# Altium PCB PCB2.PcbDoc
Units mil, origin at the board's own origin, x right, y up, seen from the top; angles counter-clockwise.
Board outline 5875 x 2810 mil, 2 copper layers (Top Layer, Bottom Layer); 41 components, 27 nets, 103 pads, 30 vias.
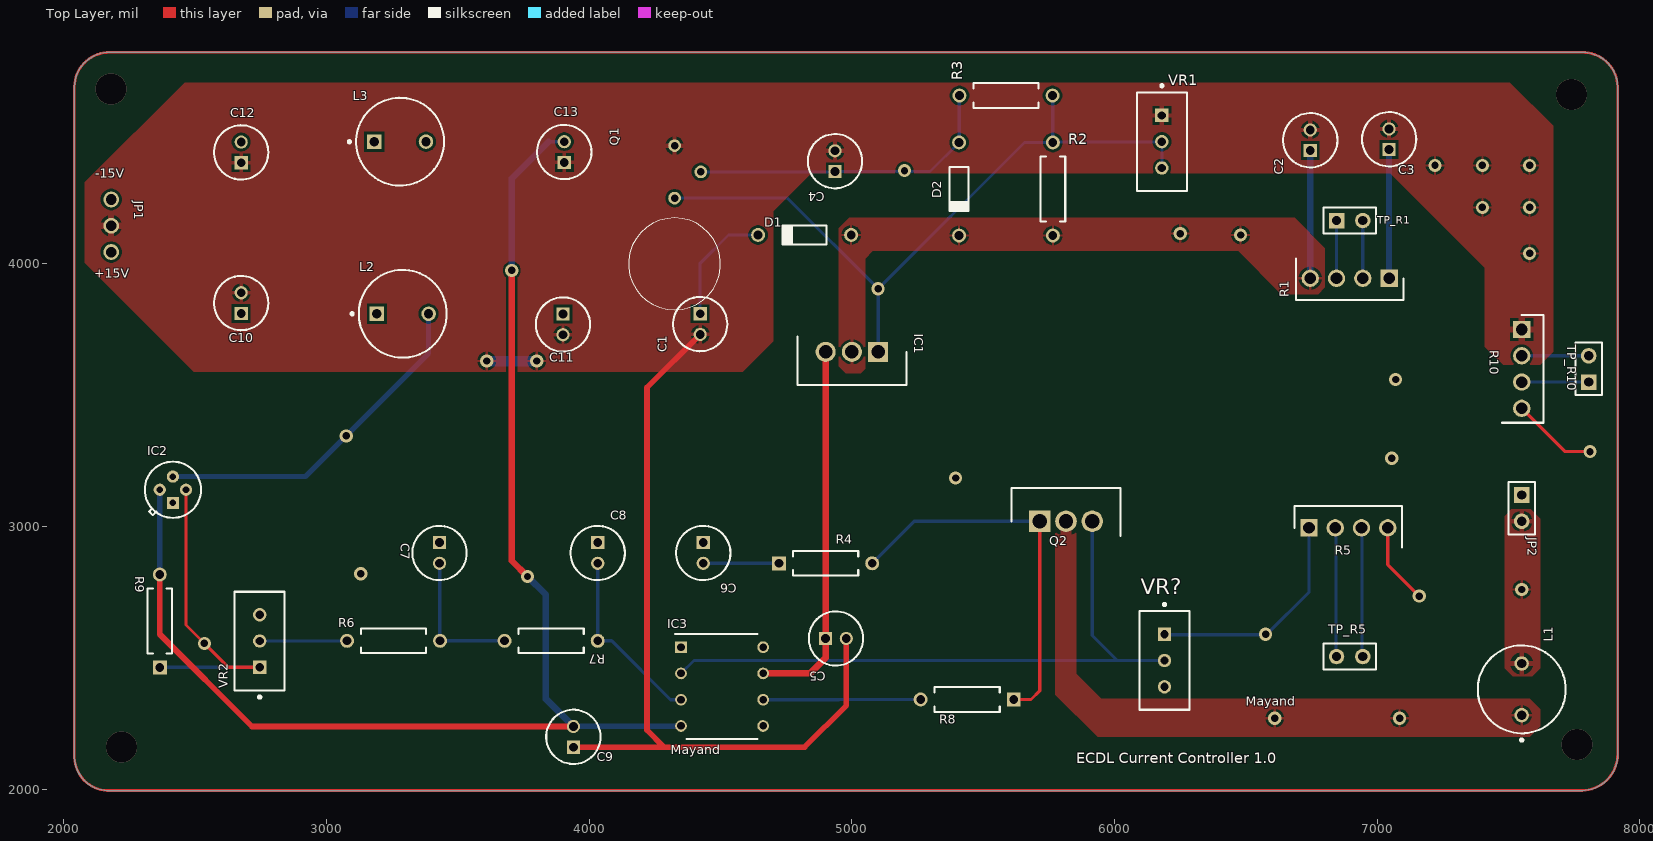
[diagram p0: Top Layer view]
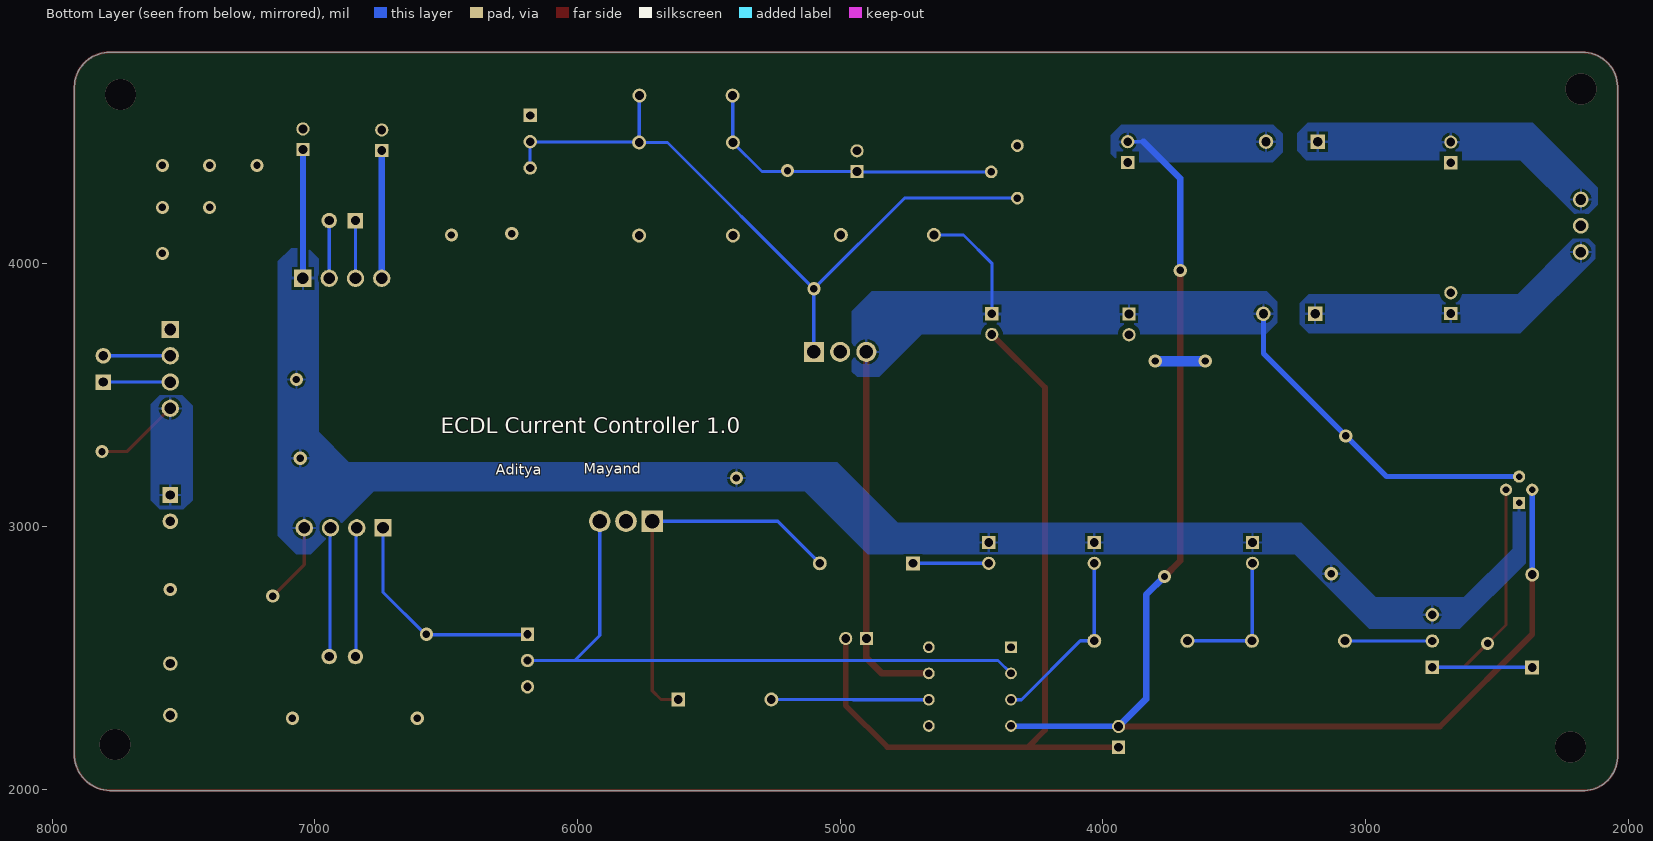
[diagram p1: Bottom Layer view, seen from below]
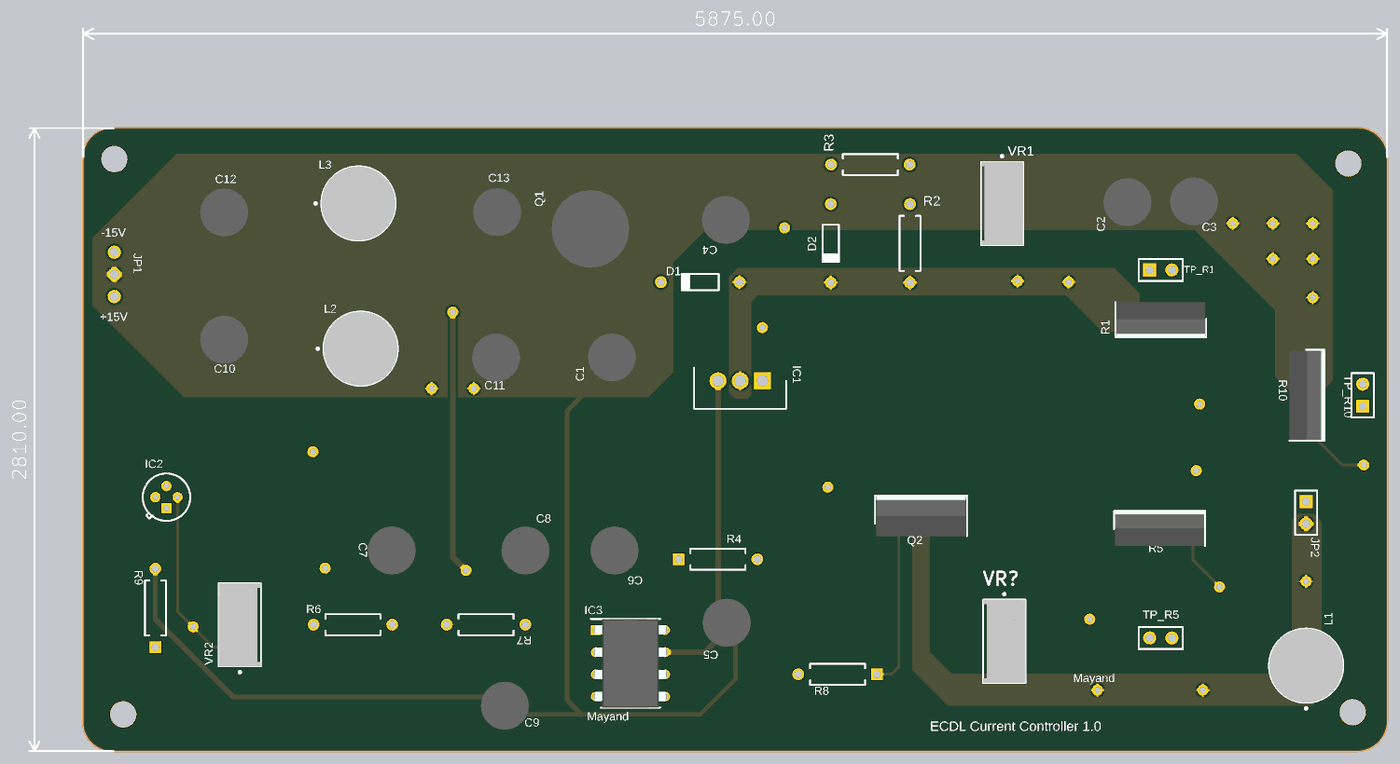
[diagram p2: 3D render of the assembled board from above, using the file's embedded part models]

## Layer stack, top to bottom
Top Solder: solder mask 0.4, Solder Resist, Dk 3.5
Top Layer: signal copper 1.4
Dielectric 1: dielectric 12.6, FR-4, Dk 4.8
Bottom Layer: signal copper 1.4
Bottom Solder: solder mask 0.4, Solder Resist, Dk 3.5

## Board outline
2040,2120 2040,4675 cw(c2172.5,4672.5) 2175,4805 7780,4805 cw(c7782.5,4672.5) 7915,4675 7915,2135 cw(c7777.5,2132.5) 7780,1995 2175,1995 cw(c2170,2125)

## Design rules (kind name [scope] priority, off if disabled: settings)
Clearance Clearance_1 [All] p1: gap=10 ignorepadtopadclearanceinfootprint=FALSE
Clearance [All] p2: gap=18 ignorepadtopadclearanceinfootprint=TRUE except(0: Arc-Hole Track-Hole SMDPad-Hole THPad-Hole Via-Hole Fill-Hole Poly-Hole Region-Hole Text-Hole; 10: Text-Text; 15: Arc-THPad Track-THPad)
PolygonConnect [All] p1: connectstyle=Relief reliefconductorwidth=10 reliefentries=4 polygonreliefangle="90 Angle" airgapwidth=10
RoutingVias [All] p1: holewidth=28 width=50 viastyle="Through Hole" minholewidth=28 minwidth=50 maxholewidth=28 maxwidth=50
SolderMaskExpansion [All] p1: expansion=4 istentingtop=FALSE
Width [All] p1: maxlimit=40 minlimit=8 preferedwidth=12
30 further rules are at their usual default settings.

## Components (designator, comment, footprint, x,y, rotation, side; value= is the part's Value field where it differs from the comment)
C1 "RFS-16V100ME3#5" CAPPRD200W65D525H1250 4422.3,3809.93 r270 top value=0.1uF
C2 "RFS-16V100ME3#5" CAPPRD200W65D525H1250 6745,4431.26 r90 top value=1uF
C3 "RFS-16V100ME3#5" CAPPRD200W65D525H1250 7045,4435 r90 top value=22uF
C4 "RFS-16V100ME3#5" CAPPRD200W65D525H1250 4935.55,4351.45 r90 top value=1uF
C5 "RFS-16V100ME3#5" CAPPRD200W65D525H1250 4900,2573.82 r0 top value=0.1uF
C6 "RFS-16V100ME3#5" CAPPRD200W65D525H1250 4434.08,2938.74 r270 top value=8.2nF
C7 "RFS-16V100ME3#5" CAPPRD200W65D525H1250 3430,2938.74 r270 top value=22uF
C8 "RFS-16V100ME3#5" CAPPRD200W65D525H1250 4032.32,2938.74 r270 top value=22uF
C9 "RFS-16V100ME3#5" CAPPRD200W65D525H1250 3939.65,2160.02 r90 top value=0.1uF
C10 "RFS-16V100ME3#5" CAPPRD200W65D525H1250 2675,3811.26 r90 top value=0.1uF
C11 "RFS-16V100ME3#5" CAPPRD200W65D525H1250 3900,3808.74 r270 top value=0.1uF
C12 "RFS-16V100ME3#5" CAPPRD200W65D525H1250 2675,4385 r90 top value=0.1uF
C13 "RFS-16V100ME3#5" CAPPRD200W65D525H1250 3905,4386.26 r90 top value=0.1uF
D1 "1N4148" NXP-SOD27-2_V 4820,4110 r180 top
D2 "1N4148" NXP-SOD27-2_V 5408.11,4285 r270 top
IC1 "LM317AT_NOPB" TO254P470X1028X1955-3P 5100,3665 r180 top
IC2 "LM399H" LM399H 2415,3090 r90 top
IC3 "Mayand" DIP794W53P254L1016H394Q8N 4505.69,2390.75 r0 top
JP1 "PIN HEADER" 1X03 2180,4145 r270 top
JP2 "Header 2" HDR1X2#1 7550,3120 r270 top
L1 "RL622-101K-RC" INDR62-500-1100X850X1100#1 7550,2380 r90 top value=100µH
L2 "RL622-101K-RC" INDR62-500-1100X850X1100#2 3290,3810 r0 top value=100µH
L3 "RL622-101K-RC" INDR62-500-1100X850X1100#2 3280,4465 r0 top value=100µH
Q1 "2N2905" 2N2905 4325,4250.2 r90 top
Q2 "IRF9Z14PBF" TO254P465X1024X2050-3P 5715,3020 r0 top
R1 "Y09261R00000F9L" TO254P401X1016X2196-4P 7045,3945 r180 top
R2 "MFR-25FBF52-475K" RESA60-630X240#1 5765,4285 r270 top value=240
R3 "MFR-25FBF52-475K" RESA60-630X240#1 5586.62,4640.58 r0 top value=50k
R4 "MFR-25FBF52-475K" RESA60-630X240#2 4900,2860 r0 top value=100
R5 "Y09261R00000F9L" TO254P401X1016X2196-4P 6740,2995 r0 top
R6 "MFR-25FBF52-475K" RESA60-630X240#1 3255,2565 r180 top value=3k
R7 "MFR-25FBF52-475K" RESA60-630X240#1 3855,2565 r180 top value=3k
R8 "MFR-25FBF52-475K" RESA60-630X240#2 5438.89,2341.59 r180 top value=10k
R9 "MFR-25FBF52-475K" RESA60-630X240#2 2365,2640 r90 top value=7.5k
R10 "Y09261R00000F9L" TO254P401X1016X2196-4P 7550,3750 r270 top
TP_R1 "Header 2" HDR1X2#1 6845,4165 r0 top
TP_R5 "Header 2" HDR1X2#2 6945,2505 r180 top
TP_R10 "Header 2" HDR1X2#1 7805,3550 r90 top
VR1 "3296W-1-103LF" BOUR-3296W 6180,4465 r270 top
VR2 "3296W-1-103LF" BOUR-3296W 2745.51,2564.12 r90 top
VR? "3296W-1-103LF" BOUR-3296W 6190,2490 r270 top

## Footprints (in the part's own frame and the unit in brackets; to place one, negate y for a bottom-side part, rotate by r counter-clockwise, add the part's x,y. Pads: shape width x height; smd on the part's side, far side on the other; paste and mask are expansions set on the pad)
1X03 [mil]
  round 60 hole 40: 1(-100,0) 2(0,0) 3(100,0)
2N2905 [mm]
  round 1.23 hole 0.73: 1(0,0) 2(2.538,-2.535) 3(5.075,0)
  silkscreen extent -10.81,-4.43 -1.91,4.43, body extent -1.91,-4.45 6.99,4.45, height 6.7
BOUR-3296W [mm] "THD, 3-Leads, Body 9.53x4.83mm, Pitch 2.54mm"
  rect 1.3x1.3 hole 0.8: 1(-2.54,0)
  round 1.3 hole 0.8: 2(0,0) 3(2.54,0)
  silkscreen extent -5.54,-2.41 4.76,2.42, body extent -4.76,-2.4 4.76,2.42, height 11.55
CAPPRD200W65D525H1250 [mm]
  rect 1.275x1.275 hole 0.85: 1(0,0)
  round 1.275 hole 0.85: 2(2,0)
  silkscreen extent -1.62,-2.62 3.62,2.63, body extent -1.75,-2.75 3.75,2.75, height 12.5
DIP794W53P254L1016H394Q8N [mil]
  rect 44.61x44.61 hole 28.86: 1(-156.26,150)
  round 44.61 hole 28.86: 2(-156.26,50) 3(-156.26,-50) 4(-156.26,-150) 5(156.26,-150) 6(156.26,-50) 7(156.26,50) 8(156.26,150)
  silkscreen extent -179,-200 135,200, body extent -161,-200 161,200, height 155
HDR1X2#1 [mm] "Connector; Header; 2 Position"
  rect 1.5x1.5 hole 0.9: 1(0,0)
  round 1.5 hole 0.9: 2(2.54,0)
  silkscreen extent -1.27,-1.27 3.81,1.27
HDR1X2#2 [mm] "Connector; Header; 2 Position"
  round 1.5 hole 0.9: 1(0,0) 2(2.54,0)
  silkscreen extent -1.27,-1.27 3.81,1.27
INDR62-500-1100X850X1100#1 [mm] "THD, 2-Leads, Dia 8.5mm, Pitch 5mm"
  round 1.4 hole 0.9: 1(-2.5,0) 2(2.5,0)
  silkscreen extent -5.02,-4.25 4.25,4.25, body extent -4.25,-4.25 4.25,4.25, height 11
INDR62-500-1100X850X1100#2 [mm] "THD, 2-Leads, Dia 8.5mm, Pitch 5mm"
  rect 1.4x1.4 hole 0.9: 1(-2.5,0)
  round 1.4 hole 0.9: 2(2.5,0)
  silkscreen extent -5.02,-4.25 4.25,4.25, body extent -4.25,-4.25 4.25,4.25, height 11
LM399H [mil]
  rect 46.54x46.54 hole 25.37: 1(0,0)
  round 46.54 hole 25.37: 2(50,-50) 3(100,0) 4(50,50)
  silkscreen extent -57,-107 157,107
NXP-SOD27-2_V [mm] "SOD27, 2-Leads, Dia 1.85mm, Body Length 4.25mm, Pin Spacing 9mm"
  round 1.35 hole 0.85: 1(-4.5,0) 2(4.5,0)
  silkscreen extent -2.12,-0.93 2.13,0.92, body extent -4.78,-0.93 4.78,0.92, height 1.85
RESA60-630X240#1 [mm] "Axial Resistor, 2-Leads, Dia 2.4mm, Body Length 6.3mm"
  round 1.35 hole 0.85: 1(-4.5,0) 2(4.5,0)
  silkscreen extent -3.15,-1.2 3.15,1.2, body extent -4.77,-1.19 4.77,1.2, height 2.4
RESA60-630X240#2 [mm] "Axial Resistor, 2-Leads, Dia 2.4mm, Body Length 6.3mm"
  rect 1.35x1.35 hole 0.85: 1(-4.5,0)
  round 1.35 hole 0.85: 2(4.5,0)
  silkscreen extent -3.15,-1.2 3.15,1.2, body extent -4.77,-1.19 4.77,1.2, height 2.4
TO254P401X1016X2196-4P [mm]
  rect 1.68x1.68 hole 1.12: 1(0,0)
  round 1.68 hole 1.12: 2(2.54,0) 3(5.08,0) 4(7.62,0)
  silkscreen extent -1.4,-1.9 9.02,2.11, body extent -1.27,-1.9 8.89,2.11, height 20.7
TO254P465X1024X2050-3P [mm]
  rect 2.085x2.085 hole 1.39: 1(0,0)
  round 2.085 hole 1.39: 2(2.54,0) 3(5.08,0)
  silkscreen extent -2.72,-1.43 7.8,3.22, body extent -2.58,-1.43 7.66,3.22, height 18.77
TO254P470X1028X1955-3P [mm]
  rect 1.935x1.935 hole 1.29: 1(0,0)
  round 1.935 hole 1.29: 2(2.54,0) 3(5.08,0)
  silkscreen extent -2.73,-1.5 7.81,3.2, body extent -3,-1.77 8.09,3.48

## Part data
C1 C2 C3 C4 C5 C6 C7 C8 C9 C10 C11 C12 C13: "Capacitor Polarised", Manufacturer_Name=Elna, Mouser Part Number=555-RFS16V100ME3#5, Datasheet Link=http://www.elna.co.jp/en/capacitor/alumi/catalog/pdf/rfs_e.pdf, Height=12.5mm, Manufacturer_Part_Number=RFS-16V100ME3#5, Mouser Price/Stock=https://www.mouser.co.uk/ProductDetail/Elna/RFS-16V100ME35?qs=HV%2FSjD3ivR%2FtACP0T6MAAg%3D%3D
D1 D2: library part CMP-004-00000-2, "High Speed Diode, 100 V, 0.45 A, -65 to 175 degC, 2-Pin SOD27, RoHS, Bulk", Case/Package=DO, Forward Current=300mA, Forward Voltage=1V, Manufacturer=Fairchild, Max Operating Temperature=175°C, Max Surge Current=4A, Min Operating Temperature=-65°C, Package Quantity=2000, Package Reference=SOD27, Peak Reverse Current=5uA, Power=500mW, Datasheet URL=http://www.nxp.com/documents/data_sheet/1N4148_1N4448.pdf, Datasheet Version=Aug-04, Diameter=1.91mm, Elements=1, Manufacturer URL=https://www.fairchildsemi.com/, Package URL=http://www.nxp.com/documents/data_sheet/1N4148_1N4448.pdf, Packaging=Bulk, Pins=2, Recovery Time=4ns, RoHS Compliant=True
IC1: "Integrated Circuit", Arrow Part Number=LM317AT/NOPB, Manufacturer_Name="Texas Instruments", Mouser Part Number=926-LM317AT/NOPB, Arrow Price/Stock=https://www.arrow.com/en/products/lm317atnopb/texas-instruments?region=nac, Datasheet Link=http://www.ti.com/lit/gpn/lm317a, Height=4.7mm, Manufacturer_Part_Number=LM317AT/NOPB, Mouser Price/Stock=https://www.mouser.co.uk/ProductDetail/Texas-Instruments/LM317AT-NOPB?qs=X1J7HmVL2ZFYFJRcNgsWcQ%3D%3D
IC2: "Integrated Circuit", Manufacturer_Name="Analog Devices", Arrow Part Number=LM399H, Arrow Price/Stock=https://www.arrow.com/en/products/lm399h/analog-devices, Datasheet Link=https://www.analog.com/media/en/technical-documentation/data-sheets/199399fc.pdf, Height=2.667mm, Manufacturer_Part_Number=LM399H
IC3: library part LT1028ACN8#PBF, "Integrated Circuit", Manufacturer_Name="Linear Technology", Datasheet Link=http://cds.linear.com/docs/en/datasheet/1028fd.pdf, Height=3.937mm, Manufacturer_Part_Number=LT1028ACN8#PBF
JP1: library part PINHD-1X3, Package=1X03, DeviceSetName=PINHD-1X3, GateName_1=A, LibraryName=adafruit, SymbolName_1=PINHD3
JP2 TP_R1 TP_R5 TP_R10: "Header, 2-Pin", LatestRevisionDate=17-Jul-2002, LatestRevisionNote="Re-released for DXP Platform.", Publisher="Altium Limited"
L1 L2 L3: library part CMP-006-00013-6, "Radial Inductor, 100 uH, +/- 10%, 0.91 A, -55 to 105 degC, 2-Pin THD, RoHS, Bulk", Case/Package=Radial, Current Rating=910mA, Inductance Tolerance=10%, Manufacturer=Bourns, Max Operating Temperature=105°C, Min Operating Temperature=-55°C, Package Description="2-Pin Radial Lead, Dia 8.5 mm, Pitch 5 mm", Package Quantity=100, Package Reference=INDR62-500-1100X850X1100, Resistance=0.28Ohm, Self Resonant Frequency=3.7MHz, Core Material=Ferrite, Datasheet URL=http://www.bourns.com/docs/Product-Datasheets/rl622_series.pdf, Datasheet Version=Aug-10, Diameter=8.5mm, Lead Pitch=5mm, Mounting Technology=TH, Packaging=Bulk, Pins=2, Q Factor=20, RoHS Compliant=True, Shielding=Unshielded, Tolerance=10%
Q1: "Transistor BJT PNP", Manufacturer_Name=MULTICOMP, Datasheet Link=https://componentsearchengine.com/Datasheets/2/2N2905.pdf, Height=6.6mm, Manufacturer_Part_Number=2N2905
Q2: "MOSFET (P-Channel)", Manufacturer_Name=Vishay, Mouser Part Number=844-IRF9Z14PBF, Arrow Part Number=IRF9Z14PBF, Arrow Price/Stock=https://www.arrow.com/en/products/irf9z14pbf/vishay, Datasheet Link=https://www.vishay.com/docs/91088/91088.pdf, Height=4.65mm, Manufacturer_Part_Number=IRF9Z14PBF, Mouser Price/Stock=https://www.mouser.co.uk/ProductDetail/Vishay-Semiconductors/IRF9Z14PBF/?qs=cvaI6ThkwxtNPJLFfJQjXw%3D%3D
R1 R5 R10: "Resistor", Manufacturer_Name=Vishay, Mouser Part Number=71-VPR221T1R0000FB, Datasheet Link=https://www.mouser.com/datasheet/2/428/vpr22021-470867.pdf, Height=4.01mm, Manufacturer_Part_Number=Y09261R00000F9L, Mouser Price/Stock=https://www.mouser.co.uk/ProductDetail/Vishay-Precision-Group-Foil-Resistors/Y09261R00000F9L?qs=NHnMxE5Fd3z%252BuQNCyVCBVA%3D%3D
R2 R3 R4 R6 R7 R8 R9: library part CMP-009-00055-4, "Axial Resistor, 475 KOhm, +/- 1%, 0.25 W, -55 to 155 degC, 2-Pin THD, RoHS, Bulk", Case/Package=Axial, Manufacturer=Yageo, Max Operating Temperature=155°C, Min Operating Temperature=-55°C, Package Description="2-Pin Axial Lead, Dia 2.4 mm, Body Length 6.3 mm", Package Quantity=200, Package Reference=MFR-25, Power=250mW, Tolerance=1%, Voltage Rating=250V, Datasheet URL=http://www.yageo.com/documents/recent/Yageo%20LR_MFR_2013.pdf, Datasheet Version=Apr-13, Manufacturer URL=http://www.yageo.com/, Mounting Technology=TH, Packaging=Bulk, RoHS Compliant=True
VR1 VR2 VR?: library part CMP-009-00038-2, "Square Trimpot(R) Trimming Potentiometer, 10 KOhm, +/- 10%, 0.5 W, -55 to 125 degC, 3-Pin THD, RoHS, Tube", Case/Package=3296W, Manufacturer=Bourns, Max Operating Temperature=150°C, Min Operating Temperature=-55°C, Package Description="3-Pin Through Hole Device, Body 9.53 x 4.83 mm, Pitch 2.54 mm", Package Quantity=50, Power=500mW, Resistance=10k, Tolerance=10%, Voltage Rating=300V, Datasheet URL=http://www.bourns.com/docs/Product-Datasheets/3296.pdf, Datasheet Version=May-16, Manufacturer URL=http://www.bourns.com/, Mounting Technology=TH, Package Reference=3296W, Packaging=Rail/Tube, RoHS Compliant=True

## Via types
v1: diameter 50, hole 28, Top Layer to Bottom Layer, 26 vias
v2: diameter 118.11, hole 118.11, Top Layer to Bottom Layer, 4 vias

## Nets (pads, with @x,y where several pads share a name; then routed paths per layer and width w, separated by ;. In a path a pad name is that pad's centre, name@x,y a point inside that pad or via, vN(x,y) a via of type N, cw(c..) or ccw(c..) an arc to the next point about the centre after c; other vN are vias at no path point)
+15V: C1.1 C5.1 C11.1 D1.2 IC1.3 IC2.3 IC3.7 L2.2 | length 3204.1
  Top Layer w25: IC3.7 4840.75,2440.75 4900,2500 C5.1 IC1.3
  Bottom Layer w12: C1.1 4422.3,4002.3 4530,4110 D1.2
  Bottom Layer w20: IC2.3 2920,3190 3388.43,3658.43 L2.2
  other v1: 3075,3345
+15V_I: C10.1 JP1.3 L2.1
-15V: C9.2 C13.2 IC2.4 IC3.4 L3.2 R9.2 | length 5122.2
  Top Layer w22: R9.2 2365,2590 2716.24,2238.76 C9.2
  Top Layer w25: v1(3705,3975) 3705,2870 v1(3765,2810)
  Bottom Layer w12: 3845,4465 C13.2 ; C9.2 3940,2239.11 C9.2@3940.64,2239.75 ; IC3.4@4348.44,2239.75 IC3.4
  Bottom Layer w20: R9.2 IC2.4
  Bottom Layer w22: C9.2@3940.64,2239.75 IC3.4@4348.44,2239.75
  Bottom Layer w25: v1(3705,3975) 3705,4325 3845,4465 ; v1(3765,2810) 3835,2740 3835,2343.41 C9.2
-15V_I: C12.2 JP1.1 L3.1
GND: C1.2 C2.2 C3.2 C4.2 C5.2 C9.1 C10.2 C11.2 C12.1 C13.1 JP1.2 Q1.3 R10.1 VR1.1 | length 3231.8
  Top Layer w20: C9.1 4285,2160.02 4820.02,2160.02 4978.74,2318.74 C5.2
  Top Layer w22: 4285,2160.02 4220,2225.02 4220,3528.89 C1.2
  Bottom Layer w40: v1(3610,3630) v1(3800,3630)
  other v1: 7580,4040 7400,4215 7580,4215 7220,4375 7400,4375 7580,4375
Iout: JP2.2 L1.2
  other v1: 7550,2760
NetC2_1: C2.1 D1.1 D2.2 IC1.2 R1.4 R2.2 | length 491.8
  Bottom Layer w12: D1.1 4998.25,4108.92 D1.1@4998.58,4108.58 ; IC1.2@4998.58,3666.42 IC1.2 ; D2.2@5407.03,4108.92 D2.2
  Bottom Layer w25: R1.4 C2.1
  other v1: 6480,4110 6250,4115
NetC4_1: C4.1 D2.1 Q1.2 R3.1 | length 1216.1
  Top Layer w12: C4.1@4934.22,4350.12 C4.1 ; D2.1@5405.57,4474.23 5408.11,4471.69 D2.1@5408.78,4472.36 ; R3.1@5408.78,4639.9 R3.1
  Bottom Layer w12: Q1.2 4934.22,4350.12 C4.1 5297.39,4351.45 D2.1 5408.78,4462.84 5408.78,4639.9 R3.1
  other v1: 5200,4355
NetC6_2: C6.2 R4.1 | length 288.8
  Bottom Layer w12: C6.2 R4.1
NetC7_2: C7.2 R6.1 R7.2 | length 541.6
  Bottom Layer w12: C7.2 3431.08,2858.92 3431.08,2566.08 R6.1 R7.2
NetC8_2: C8.2 IC3.3 R7.1 | length 705.2
  Bottom Layer w12: C8.2 4032.24,2859.92 4032.24,2565.08 R7.1 4085,2565 4309.25,2340.75 IC3.3
NetIC1_1: IC1.1 Q1.1 R2.1 R3.2 VR1.2 VR1.3 | length 2786.6
  Top Layer w12: R3.2 R3.2@5764.39,4639.97 ; R2.1@5764.39,4477.77 R2.1@5766.08,4476.08 ; R2.1 R2.1@5766.08,4463.25 ; R2.1@5767.83,4465 R2.1@5766.08,4463.25 ; R2.1@5778.58,4463.58 R2.1@5766.08,4476.08 ; R2.1@5766.08,4463.25 R2.1@5766.08,4476.08
  Bottom Layer w12: Q1.1 4754.8,4250.2 v1(5100,3905) ; IC1.1 v1(5100,3905) ; R3.2 5764.39,4639.97 5764.39,4462.77 R2.1 ; VR1.3 VR1.2 6178.58,4463.58 5766.42,4463.58 R2.1 ; v1(5100,3905) 5657.17,4462.17 R2.1
NetIC2_2: IC2.2 R9.1 VR2.1 | length 1243.2
  Top Layer w12: IC2.2 2465,2625 2625.88,2464.12 VR2.1
  Bottom Layer w12: R9.1 2366.28,2464.12 VR2.1
  other v1: 2535,2555
NetIC3_2: IC3.2 Q2.3 VR?.2 | length 2433.3
  Top Layer w12: VR?.2@6187.92,2492.08 VR?.2
  Bottom Layer w12: IC3.2 4398.68,2490 6010,2490 ; Q2.3 5915,2585 6010,2490 ; VR?.2 6010,2490
NetIC3_6: IC3.6 R8.2 | length 600.1
  Bottom Layer w12: IC3.6@4661.98,2340.78 4950.53,2340.78 4950.77,2341.02 5261.15,2341.02 R8.2
NetJP2_1: JP2.1 R10.4 | length 328.3
  Top Layer w12: R10.4 7715,3285 v1(7810,3285)
NetL1_1: L1.1 Q2.2
  other v1: 6610,2270 7085,2270
NetQ2_1: Q2.1 R4.2 R8.1 | length 1463.4
  Top Layer w12: R8.1 5681.59,2341.59 5715,2375 Q2.1
  Bottom Layer w12: R4.2 5237.17,3020 Q2.1 ; R8.1@5615,2342.65 R8.1
NetR1_2: R1.2 TP_R1.2 | length 220
  Bottom Layer w12: R1.2 TP_R1.2
NetR1_3: R1.3 TP_R1.1 | length 220
  Bottom Layer w12: R1.3 TP_R1.1
NetR5_1: R5.1 VR?.1 | length 863
  Bottom Layer w12: VR?.1 6192.08,2587.92 6577.92,2587.92 6740,2750 R5.1
  other v1: 6575,2590
NetR5_2: R5.2 TP_R5.2 | length 492.1
  Bottom Layer w12: R5.2 6842.5,2992.5 6842.5,2507.5 TP_R5.2
NetR5_3: R5.3 TP_R5.1 | length 492.1
  Bottom Layer w12: R5.3 6942.5,2992.5 6942.5,2507.5 TP_R5.1
NetR6_2: R6.2 VR2.2 | length 332.7
  Bottom Layer w12: VR2.2 2745.96,2564.56 3077.39,2564.56 R6.2
NetR10_2: R10.2 TP_R10.2 | length 255
  Bottom Layer w12: R10.2 TP_R10.2
NetR10_3: R10.3 TP_R10.1 | length 255
  Bottom Layer w12: R10.3 TP_R10.1
Vreg: C3.1 C6.1 C7.1 C8.1 IC2.1 R1.1 R5.4 VR2.3 | length 799.7
  Top Layer w12: R5.4 7040,2855 v1(7160,2735)
  Bottom Layer w22: R1.1 C3.1
  other v1: 3130,2820 5395,3185 7055,3260 7070,3560
pads on no net: IC3.1 IC3.5 IC3.8 VR?.3
copper on no net: | length 17141.7
  Top Layer w10: 2040,2120 ccw(c2170,2125) 2175,1995 7780,1995 ccw(c7777.5,2132.5) 7915,2135 7915,4675 ccw(c7782.5,4672.5) 7780,4805 2175,4805 ccw(c2172.5,4672.5) 2040,4675 2040,2120
  other v2: 2220,2160 7760,2170 7740,4645 2180,4665

## Polygon pours and split planes (outlines as drawn)
NetJP2_1 on Bottom Layer "NETJP2_1_L02_P012" (solid, pour order 12): 7465,3100 7500,3065 7590,3065 7625,3100 7625,3465 7590,3500 7505,3500 7465,3460 7465,3390
Vreg on Bottom Layer "VREG_L02_P008" (solid, pour order 8): 6985,4020 7025,4060 7090,4060 7140,4010 7140,2965 7070,2895 7014.43,2895 6774.43,3135 5135,3135 4895,2895 3270,2895 2985,2610 2640,2610 2390,2860 2390,3115 2440,3115 2440,2915 2625,2730 2960,2730 3245,3015 4780,3015 5010,3245 6870,3245 6985,3360
+15V on Bottom Layer "+15V_L02_P006" (solid, pour order 6): 3375,3895 3335,3855 3335,3775 3378.81,3731.19 4688.81,3731.19 4850,3570 4935,3570 4955,3590 4955,3820 4880,3895
-15V on Bottom Layer "-15V_L02_P004" (solid, pour order 4): 3350,4530 3315,4495 3315,4425 3353.74,4386.26 3936.26,4386.26 3970,4420 3970,4490 3930,4530
+15V_I on Bottom Layer "+15V_I_L02_P003" (solid, pour order 3): 2150,4095 2210,4095 2420,3885 3215,3885 3250,3850 3250,3770 3215,3735 2410,3735 2125,4020 2125,4070
-15V_I on Bottom Layer "-15V_I_L02_P002" (solid, pour order 2): 3220,4537.89 3260,4497.89 3260,4430 3225,4395 2410,4395 2205,4190 2150,4190 2115,4225 2115,4290 2362.89,4537.89
Iout on Top Layer "IOUT_L01_P011" (solid, pour order 11): 7485,2460 7515,2430 7590,2430 7620,2460 7620,3030 7585,3065 7510,3065 7485,3040
NetL1_1 on Top Layer "NETL1_1_L01_P010" (solid, pour order 10): 5855,3090 5775,3090 5775,2360 5935,2200 7580,2200 7620,2240 7620,2305 7580,2345 5950,2345 5855,2440
GND on Top Layer "GND_L01_P009" (solid, pour order 9): 2080,4310 2080,4005 2495,3590 4585,3590 4700,3705 4700,4200 4845,4345 7050,4345 7410,3985 7410,3685 7480,3615 7620,3615 7670,3665 7670,4525 7505,4690 2460,4690
NetC2_1 on Top Layer "NETC2_1_L01_P007" (solid, pour order 7): 4950,4135 4950,3610 4976.95,3583.05 5033.05,3583.05 5050,3600 5050,4020 5080,4050 5105,4050 6470,4050 6635,3885 6775,3885 6800,3910 6800,4060 6685,4175 4990,4175

## Silkscreen, mask and mechanical layers (free items; w line width, h text height)
Top Overlay:
  text "-15V" at 2120,4315.67 h60
  text "+15V" at 2115,3935.67 h60
  text "Mayand" at 6500,2306.27 h60
  text "ECDL Current Controller 1.0" at 5855,2085.78 h70
Bottom Overlay:
  text "ECDL Current Controller 1.0" at 6520,3355 h60
  text "Mayand" at 5975,3188.15 h70
  text "Aditya" at 6310,3183.15 h70

## Dimensions
2175,4805 to 2175,1995 on Top Overlay
2040,4675 to 7915,4675 on Top Overlay